# EAGLE board stm32f4-discovery-breakout-v1 (EAGLE 7.1.0)
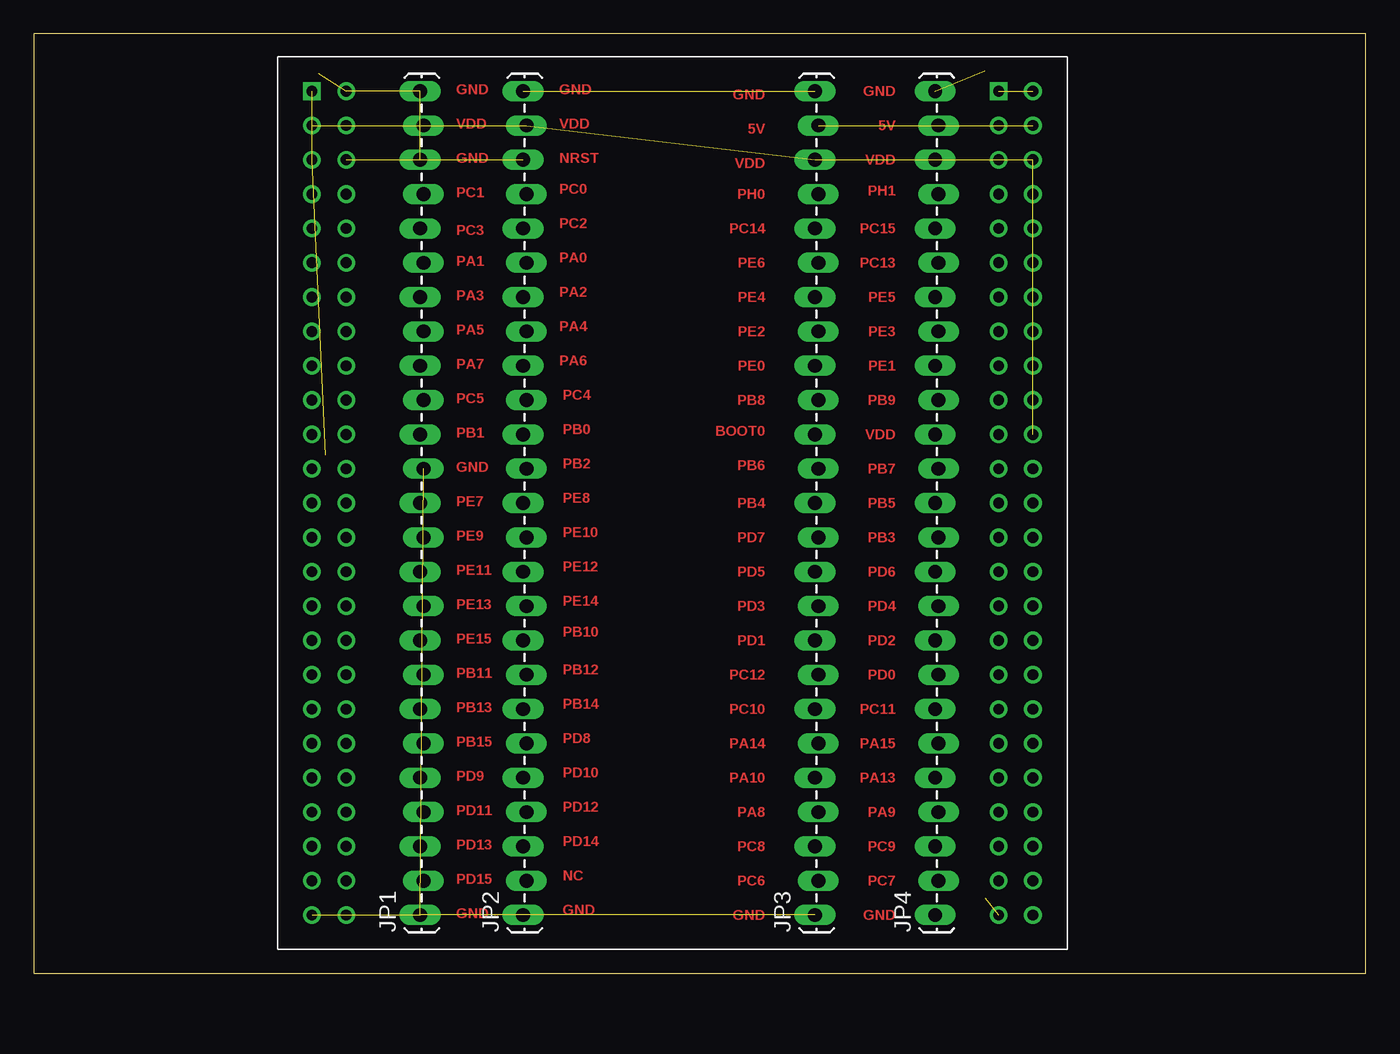
[diagram p0: board, top side]
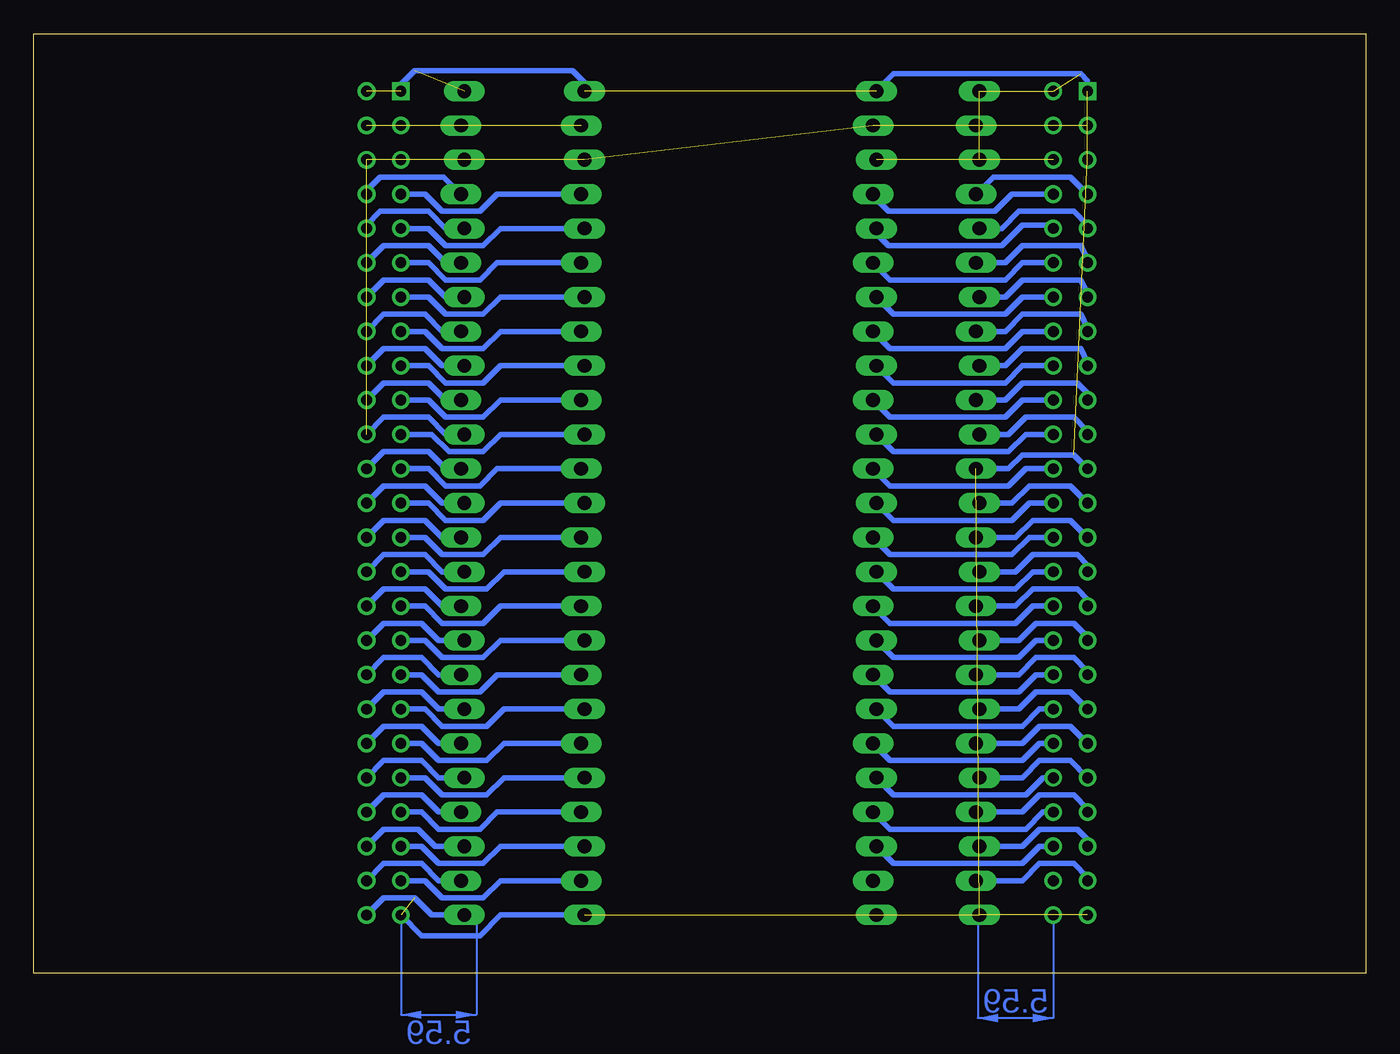
[diagram p1: board, bottom side, seen from below]

Size 98.53 x 69.52 mm. Coordinates in mm from the lower left corner, seen from the top.
Outline: 0,0 98.53,0 98.53,69.52 0,69.52 0,0
Copper layers (1*16): Top 0.035mm / dielectric 1.5mm / Bottom 0.035mm
Design rules "default": minimum track width 10mil, minimum drill 24mil, track to track 8mil, track to pad 8mil, pad to pad 8mil, via to via 8mil, smd to smd 8mil, copper to edge 40mil, drill to drill 8mil, minimum pad ring 10mil, minimum via ring 8mil, stop-mask expansion 4mil, vias tented up to drill 0mil, thermal gap 10mil

## Footprints (pad centres in the part's own frame; a part is rotated, then mirrored left to right if it is on the bottom)
1X25_LOCK_LONGPADS = drill 1.016 long: 1 0,0.127; 2 2.54,-0.127; 3 5.08,0.127; 4 7.62,-0.127; 5 10.16,0.127; 6 12.7,-0.127; 7 15.24,0.127; 8 17.78,-0.127; 9 20.32,0.127; 10 22.86,-0.127; 11 25.4,0.127; 12 27.94,-0.127; 13 30.48,0.127; 14 33.02,-0.127; 15 35.56,0.127; 16 38.1,-0.127; 17 40.64,0.127; 18 43.18,-0.127; 19 45.72,0.127; 20 48.26,-0.127; 21 50.8,0.127; 22 53.34,-0.127; 23 55.88,0.127; 24 58.42,-0.127; 25 60.96,0.127
STM32F4-DISCOVERY = drill 0.8 square: P$1 -27.94,30.48; P$51 22.86,30.48 | drill 0.8: P$2 -25.4,30.48; P$3 -27.94,27.94; P$4 -25.4,27.94; P$5 -27.94,25.4; P$6 -25.4,25.4; P$7 -27.94,22.86; P$8 -25.4,22.86; P$9 -27.94,20.32; P$10 -25.4,20.32; P$11 -27.94,17.78; P$12 -25.4,17.78; P$13 -27.94,15.24; P$14 -25.4,15.24; P$15 -27.94,12.7; P$16 -25.4,12.7; P$17 -27.94,10.16; P$18 -25.4,10.16; P$19 -27.94,7.62; P$20 -25.4,7.62; P$21 -27.94,5.08; P$22 -25.4,5.08; P$23 -27.94,2.54; P$24 -25.4,2.54; P$25 -27.94,0; P$26 -25.4,0; P$27 -27.94,-2.54; P$28 -25.4,-2.54; P$29 -27.94,-5.08; P$30 -25.4,-5.08; P$31 -27.94,-7.62; P$32 -25.4,-7.62; P$33 -27.94,-10.16; P$34 -25.4,-10.16; P$35 -27.94,-12.7; P$36 -25.4,-12.7; P$37 -27.94,-15.24; P$38 -25.4,-15.24; P$39 -27.94,-17.78; P$40 -25.4,-17.78; P$41 -27.94,-20.32; P$42 -25.4,-20.32; P$43 -27.94,-22.86; P$44 -25.4,-22.86; P$45 -27.94,-25.4; P$46 -25.4,-25.4; P$47 -27.94,-27.94; P$48 -25.4,-27.94; P$49 -27.94,-30.48; P$50 -25.4,-30.48; P$52 25.4,30.48; P$53 22.86,27.94; P$54 25.4,27.94; P$55 22.86,25.4; P$56 25.4,25.4; P$57 22.86,22.86; P$58 25.4,22.86; P$59 22.86,20.32; P$60 25.4,20.32; P$61 22.86,17.78; P$62 25.4,17.78; P$63 22.86,15.24; P$64 25.4,15.24; P$65 22.86,12.7; P$66 25.4,12.7; P$67 22.86,10.16; P$68 25.4,10.16; P$69 22.86,7.62; P$70 25.4,7.62; P$71 22.86,5.08; P$72 25.4,5.08; P$73 22.86,2.54; P$74 25.4,2.54; P$75 22.86,0; P$76 25.4,0; P$77 22.86,-2.54; P$78 25.4,-2.54; P$79 22.86,-5.08; P$80 25.4,-5.08; P$81 22.86,-7.62; P$82 25.4,-7.62; P$83 22.86,-10.16; P$84 25.4,-10.16; P$85 22.86,-12.7; P$86 25.4,-12.7; P$87 22.86,-15.24; P$88 25.4,-15.24; P$89 22.86,-17.78; P$90 25.4,-17.78; P$91 22.86,-20.32; P$92 25.4,-20.32; P$93 22.86,-22.86; P$94 25.4,-22.86; P$95 22.86,-25.4; P$96 25.4,-25.4; P$97 22.86,-27.94; P$98 25.4,-27.94; P$99 22.86,-30.48; P$100 25.4,-30.48

## Placement (x,y rotation side)
JP1  M25LOCK_LONGPADS  [1X25_LOCK_LONGPADS]  28.7,4.32 90 top
JP2  M25LOCK_LONGPADS  [1X25_LOCK_LONGPADS]  36.32,4.32 90 top
JP3  M25LOCK_LONGPADS  [1X25_LOCK_LONGPADS]  57.91,4.32 90 top
JP4  M25LOCK_LONGPADS  [1X25_LOCK_LONGPADS]  66.8,4.32 90 top
U$1  STM32F4-DISCOVERY  [STM32F4-DISCOVERY]  48.51,34.8 0 top

## Library data of the parts
JP1-JP4 = SparkFun-Connectors
U$1 = STM32F4-DISCOVERY

## Nets
5V: JP3.24 JP4.24 U$1.P$53 U$1.P$54
BOOT0: JP3.15 U$1.P$71
GND: JP1.1 JP1.14 JP1.23 JP1.25 JP2.1 JP2.25 JP3.1 JP3.25 JP4.1 JP4.25 U$1.P$1 U$1.P$2 U$1.P$5 U$1.P$23 U$1.P$49 U$1.P$50 U$1.P$51 U$1.P$52 U$1.P$99 U$1.P$100
NRST: JP2.23 U$1.P$6
PA0: JP2.20 U$1.P$12
PA1: JP1.20 U$1.P$11
PA2: JP2.19 U$1.P$14
PA3: JP1.19 U$1.P$13
PA4: JP2.18 U$1.P$16
PA5: JP1.18 U$1.P$15
PA6: JP2.17 U$1.P$18
PA7: JP1.17 U$1.P$17
PA8: JP3.4 U$1.P$93
PA9: JP4.4 U$1.P$94
PA10: JP3.5 U$1.P$91
PA13: JP4.5 U$1.P$92
PA14: JP3.6 U$1.P$89
PA15: JP4.6 U$1.P$90
PB0: JP2.15 U$1.P$22
PB1: JP1.15 U$1.P$21
PB2: JP2.14 U$1.P$24
PB3: JP4.12 U$1.P$78
PB4: JP3.13 U$1.P$75
PB5: JP4.13 U$1.P$76
PB6: JP3.14 U$1.P$73
PB7: JP4.14 U$1.P$74
PB8: JP3.16 U$1.P$69
PB9: JP4.16 U$1.P$70
PB10: JP2.9 U$1.P$34
PB11: JP1.8 U$1.P$35
PB12: JP2.8 U$1.P$36
PB13: JP1.7 U$1.P$37
PB14: JP2.7 U$1.P$38
PB15: JP1.6 U$1.P$39
PC0: JP2.22 U$1.P$8
PC1: JP1.22 U$1.P$7
PC2: JP2.21 U$1.P$10
PC3: JP1.21 U$1.P$9
PC4: JP2.16 U$1.P$20
PC5: JP1.16 U$1.P$19
PC6: JP3.2 U$1.P$97
PC7: JP4.2 U$1.P$98
PC8: JP3.3 U$1.P$95
PC9: JP4.3 U$1.P$96
PC10: JP3.7 U$1.P$87
PC11: JP4.7 U$1.P$88
PC12: JP3.8 U$1.P$85
PC13: JP4.20 U$1.P$62
PC14: JP3.21 U$1.P$59
PC15: JP4.21 U$1.P$60
PD0: JP4.8 U$1.P$86
PD1: JP3.9 U$1.P$83
PD2: JP4.9 U$1.P$84
PD3: JP3.10 U$1.P$81
PD4: JP4.10 U$1.P$82
PD5: JP3.11 U$1.P$79
PD6: JP4.11 U$1.P$80
PD7: JP3.12 U$1.P$77
PD8: JP2.6 U$1.P$40
PD9: JP1.5 U$1.P$41
PD10: JP2.5 U$1.P$42
PD11: JP1.4 U$1.P$43
PD12: JP2.4 U$1.P$44
PD13: JP1.3 U$1.P$45
PD14: JP2.3 U$1.P$46
PD15: JP1.2 U$1.P$47
PE0: JP3.17 U$1.P$67
PE1: JP4.17 U$1.P$68
PE2: JP3.18 U$1.P$65
PE3: JP4.18 U$1.P$66
PE4: JP3.19 U$1.P$63
PE5: JP4.19 U$1.P$64
PE6: JP3.20 U$1.P$61
PE7: JP1.13 U$1.P$25
PE8: JP2.13 U$1.P$26
PE9: JP1.12 U$1.P$27
PE10: JP2.12 U$1.P$28
PE11: JP1.11 U$1.P$29
PE12: JP2.11 U$1.P$30
PE13: JP1.10 U$1.P$31
PE14: JP2.10 U$1.P$32
PE15: JP1.9 U$1.P$33
PH0: JP3.22 U$1.P$57
PH1: JP4.22 U$1.P$58
VDD: JP1.24 JP2.24 JP3.23 JP4.15 JP4.23 U$1.P$3 U$1.P$4 U$1.P$55 U$1.P$56 U$1.P$72

## Tracks (layer width: path | path; a pad name or v marks a point on that pad's centre or on a via)
5V  (3 unrouted)
BOOT0
  Bottom 0.406: JP3.15 64.01,39.88 65.28,38.61 67.82,38.61 69.09,39.88 U$1.P$71
GND  (14 unrouted)
  Bottom 0.406: JP3.25 57.78,65.91 58.67,66.8 70.36,66.8 71.37,65.79 U$1.P$51 | U$1.P$1 20.57,66.04 21.08,66.55 34.92,66.55 JP2.25 | U$1.P$23 21.59,38.35 25.4,38.35 26.42,37.34 JP1.14 | JP3.1 64.01,4.32 65.53,2.79 69.85,2.79 U$1.P$99 | JP4.1 69.09,4.32 70.36,5.59 72.64,5.59 U$1.P$100
NRST  (1 unrouted)
PA0
  Bottom 0.406: U$1.P$12 25.4,52.58 26.67,51.31 35.18,51.31 JP2.20
PA1
  Bottom 0.406: U$1.P$11 20.57,52.83 21.08,53.85 25.4,53.85 26.67,52.58 JP1.20
PA2
  Bottom 0.406: U$1.P$14 25.4,50.04 26.67,48.77 34.92,48.77 JP2.19
PA3
  Bottom 0.406: U$1.P$13 20.57,50.29 21.08,51.31 25.4,51.31 26.67,50.04 JP1.19
PA4
  Bottom 0.406: U$1.P$16 25.4,47.5 26.67,46.23 35.18,46.23 JP2.18
PA5
  Bottom 0.406: U$1.P$15 20.57,47.75 21.08,48.77 25.4,48.77 26.67,47.5 JP1.18
PA6
  Bottom 0.406: U$1.P$18 25.4,44.96 26.67,43.69 34.92,43.69 JP2.17
PA7
  Bottom 0.406: U$1.P$17 20.57,45.21 21.08,46.23 25.4,46.23 26.67,44.96 JP1.17
PA8
  Bottom 0.406: JP3.4 64.26,11.94 65.53,10.67 68.58,10.67 69.85,11.94 U$1.P$93
PA9
  Bottom 0.406: JP4.4 68.58,11.94 69.85,13.21 72.64,13.21 U$1.P$94
PA10
  Bottom 0.406: JP3.5 63.75,14.48 65.02,13.21 68.33,13.21 69.6,14.48 U$1.P$91
PA13
  Bottom 0.406: JP4.5 68.58,14.48 69.85,15.75 72.64,15.75 U$1.P$92
PA14
  Bottom 0.406: JP3.6 63.75,17.02 65.02,15.75 68.58,15.75 69.85,17.02 U$1.P$89
PA15
  Bottom 0.406: JP4.6 68.58,17.02 69.85,18.29 72.64,18.29 U$1.P$90
PB0
  Bottom 0.406: U$1.P$22 25.15,39.88 26.42,38.61 34.92,38.61 JP2.15
PB1
  Bottom 0.406: U$1.P$21 20.57,40.13 21.59,41.15 25.15,41.15 26.42,39.88 JP1.15
PB2
  Bottom 0.406: U$1.P$24 25.15,37.34 26.42,36.07 35.18,36.07 JP2.14
PB3
  Bottom 0.406: JP4.12 68.33,32.26 69.6,33.53 72.64,33.53 U$1.P$78
PB4
  Bottom 0.406: JP3.13 64.01,34.8 65.28,33.53 68.07,33.53 69.34,34.8 U$1.P$75
PB5
  Bottom 0.406: JP4.13 68.33,34.8 69.6,36.07 72.64,36.07 U$1.P$76
PB6
  Bottom 0.406: JP3.14 64.26,37.34 65.53,36.07 68.07,36.07 69.34,37.34 U$1.P$73
PB7
  Bottom 0.406: JP4.14 68.07,37.34 69.34,38.61 72.64,38.61 U$1.P$74
PB8
  Bottom 0.406: JP3.16 64.01,42.42 65.28,41.15 68.07,41.15 69.34,42.42 U$1.P$69
PB9
  Bottom 0.406: JP4.16 68.07,42.42 69.34,43.69 72.64,43.69 U$1.P$70
PB10
  Bottom 0.406: U$1.P$34 24.38,24.64 25.65,23.37 34.92,23.37 JP2.9
PB11
  Bottom 0.406: U$1.P$35 20.57,22.35 21.59,23.37 24.38,23.37 25.65,22.1 JP1.8
PB12
  Bottom 0.406: U$1.P$36 24.38,22.1 25.65,20.83 35.18,20.83 JP2.8
PB13
  Bottom 0.406: U$1.P$37 21.84,20.83 24.38,20.83 25.65,19.56 JP1.7
PB14
  Bottom 0.406: U$1.P$38 24.13,19.56 25.4,18.29 34.92,18.29 JP2.7
PB15
  Bottom 0.406: U$1.P$39 21.84,18.29 24.13,18.29 25.4,17.02 JP1.6
PC0
  Bottom 0.406: JP2.22 36.45,57.53 35.31,56.39 27.43,56.39 26.16,57.66 U$1.P$8
PC1
  Bottom 0.406: U$1.P$7 21.84,58.93 27.56,58.93 JP1.22
PC2
  Bottom 0.406: JP2.21 36.2,54.74 35.31,53.85 26.92,53.85 25.4,55.37 23.37,55.37 U$1.P$10
PC3
  Bottom 0.406: U$1.P$9 20.57,55.37 21.59,56.39 25.65,56.39 26.92,55.12 JP1.21
PC4
  Bottom 0.406: U$1.P$20 25.4,42.42 26.67,41.15 35.18,41.15 JP2.16
PC5
  Bottom 0.406: U$1.P$19 20.57,42.93 21.34,43.69 25.4,43.69 26.67,42.42 JP1.16
PC6
  Bottom 0.406: JP3.2 64.01,6.86 65.28,5.59 68.33,5.59 69.6,6.86 U$1.P$97
PC7
  Bottom 0.406: JP4.2 68.58,6.86 69.85,8.13 72.64,8.13 U$1.P$98
PC8
  Bottom 0.406: JP3.3 64.01,9.4 65.28,8.13 68.58,8.13 69.85,9.4 U$1.P$95
PC9
  Bottom 0.406: JP4.3 68.83,9.4 70.1,10.67 72.64,10.67 U$1.P$96
PC10
  Bottom 0.406: JP3.7 63.75,19.56 65.02,18.29 68.33,18.29 69.6,19.56 U$1.P$87
PC11
  Bottom 0.406: JP4.7 68.58,19.56 69.85,20.83 72.64,20.83 U$1.P$88
PC12
  Bottom 0.406: JP3.8 64.26,22.1 65.53,20.83 68.58,20.83 69.85,22.1 U$1.P$85
PC13
  Bottom 0.406: JP4.20 68.07,52.58 69.34,53.85 72.64,53.85 U$1.P$62
PC14
  Bottom 0.406: JP3.21 64.01,55.12 65.28,53.85 68.07,53.85 69.34,55.12 U$1.P$59
PC15
  Bottom 0.406: U$1.P$60 73.91,55.37 72.9,56.39 69.34,56.39 68.07,55.12 JP4.21
PD0
  Bottom 0.406: JP4.8 68.58,22.1 69.85,23.37 72.64,23.37 U$1.P$86
PD1
  Bottom 0.406: JP3.9 64.01,24.64 65.28,23.37 68.33,23.37 69.6,24.64 U$1.P$83
PD2
  Bottom 0.406: JP4.9 68.58,24.64 69.85,25.91 72.64,25.91 U$1.P$84
PD3
  Bottom 0.406: JP3.10 64.01,27.18 65.28,25.91 68.33,25.91 69.6,27.18 U$1.P$81
PD4
  Bottom 0.406: JP4.10 68.33,27.18 69.6,28.45 72.64,28.45 U$1.P$82
PD5
  Bottom 0.406: JP3.11 63.75,29.72 65.02,28.45 68.07,28.45 69.34,29.72 U$1.P$79
PD6
  Bottom 0.406: JP4.11 68.33,29.72 69.6,30.99 72.64,30.99 U$1.P$80
PD7
  Bottom 0.406: JP3.12 64.01,32.26 65.28,30.99 68.33,30.99 69.6,32.26 U$1.P$77
PD8
  Bottom 0.406: U$1.P$40 24.13,17.02 25.4,15.75 35.18,15.75 JP2.6
PD9
  Bottom 0.406: U$1.P$41 21.84,15.75 24.13,15.75 25.4,14.48 JP1.5
PD10
  Bottom 0.406: U$1.P$42 23.88,14.48 25.15,13.21 34.92,13.21 JP2.5
PD11
  Bottom 0.406: U$1.P$43 20.57,12.19 21.59,13.21 24.13,13.21 25.4,11.94 JP1.4
PD12
  Bottom 0.406: U$1.P$44 23.88,11.94 25.15,10.67 35.18,10.67 JP2.4
PD13
  Bottom 0.406: U$1.P$45 20.57,9.91 21.34,10.67 24.13,10.67 25.4,9.4 JP1.3
PD14
  Bottom 0.406: U$1.P$46 24.13,9.4 25.4,8.13 34.92,8.13 JP2.3
PD15
  Bottom 0.406: U$1.P$47 20.57,7.11 21.59,8.13 24.13,8.13 25.4,6.86 JP1.2
PE0
  Bottom 0.406: JP3.17 64.01,44.96 65.28,43.69 68.07,43.69 69.34,44.96 U$1.P$67
PE1
  Bottom 0.406: JP4.17 68.33,44.96 69.6,46.23 72.64,46.23 U$1.P$68
PE2
  Bottom 0.406: JP3.18 64.01,47.5 65.28,46.23 68.33,46.23 69.6,47.5 U$1.P$65
PE3
  Bottom 0.406: JP4.18 68.33,47.5 69.6,48.77 72.64,48.77 U$1.P$66
PE4
  Bottom 0.406: JP3.19 64.01,50.04 65.28,48.77 68.07,48.77 69.34,50.04 U$1.P$63
PE5
  Bottom 0.406: JP4.19 68.07,50.04 69.34,51.31 72.64,51.31 U$1.P$64
PE6
  Bottom 0.406: JP3.20 64.26,52.58 65.53,51.31 68.07,51.31 69.34,52.58 U$1.P$61
PE7
  Bottom 0.406: U$1.P$25 21.84,36.07 24.89,36.07 26.16,34.8 JP1.13
PE8
  Bottom 0.406: U$1.P$26 24.89,34.8 26.16,33.53 34.92,33.53 JP2.13
PE9
  Bottom 0.406: U$1.P$27 21.84,33.53 24.64,33.53 25.91,32.26 JP1.12
PE10
  Bottom 0.406: U$1.P$28 24.89,32.26 26.16,30.99 35.18,30.99 JP2.12
PE11
  Bottom 0.406: U$1.P$29 20.57,30.23 21.34,30.99 24.64,30.99 25.91,29.72 JP1.11
PE12
  Bottom 0.406: U$1.P$30 24.64,29.72 25.91,28.45 34.92,28.45 JP2.11
PE13
  Bottom 0.406: U$1.P$31 20.57,27.69 21.34,28.45 24.64,28.45 25.91,27.18 JP1.10
PE14
  Bottom 0.406: U$1.P$32 24.64,27.18 25.91,25.91 35.18,25.91 JP2.10
PE15
  Bottom 0.406: U$1.P$33 20.57,24.89 21.59,25.91 24.38,25.91 25.65,24.64 JP1.9
PH0
  Bottom 0.406: JP3.22 64.26,57.66 65.53,56.39 68.33,56.39 69.6,57.66 U$1.P$57
PH1
  Bottom 0.406: U$1.P$58 73.91,57.91 72.9,58.93 68.2,58.93 JP4.22
VDD  (8 unrouted)
  Bottom 0.406: JP4.15 68.07,39.88 69.34,41.15 72.64,41.15 U$1.P$72
(copper drawn outside any net)
  shapes: Bottom area x2

## Text on the board
Top: GND | GND | GND | GND | 5V | VDD | VDD | 5V | GND | NRST | VDD | VDD | PC0 | PH0 | PH1 | PC1 | PC3 | PC2 | PC14 | PC15 | PA0 | PE6 | PC13 | PA1 | PA3 | PA2 | PE4 | PE5 | PA5 | PA4 | PE2 | PE3 | PA7 | PA6 | PE0 | PE1 | PC5 | PC4 | PB8 | PB9 | PB1 | PB0 | BOOT0 | VDD | PB6 | GND | PB2 | PB7 | PE7 | PE8 | PB4 | PB5 | PE9 | PE10 | PD7 | PB3 | PE12 | PD5 | PD6 | PE11 | PE13 | PE14 | PD3 | PD4 | PB10 | PD1 | PD2 | PE15 | PB11 | PB12 | PC12 | PD0 | PB14 | PC10 | PC11 | PB13 | PB15 | PD8 | PA14 | PA15 | PD9 | PD10 | PA10 | PA13 | PD11 | PD12 | PA8 | PA9 | PD13 | PD14 | PC8 | PC9 | PD15 | NC | PC6 | PC7 | GND | GND | GND | GND